# Altium PCB WUT-YJ-4-3-1.PcbDoc (part 2 of 11)
Units mm, origin at the board's own origin, x right, y up, seen from the top; angles counter-clockwise.
Board outline 85 x 56 mm, 4 copper layers (Top Layer, GND_Plane, 3V3_Plane, Bottom Layer); 182 components, 321 nets, 1106 pads, 360 vias.
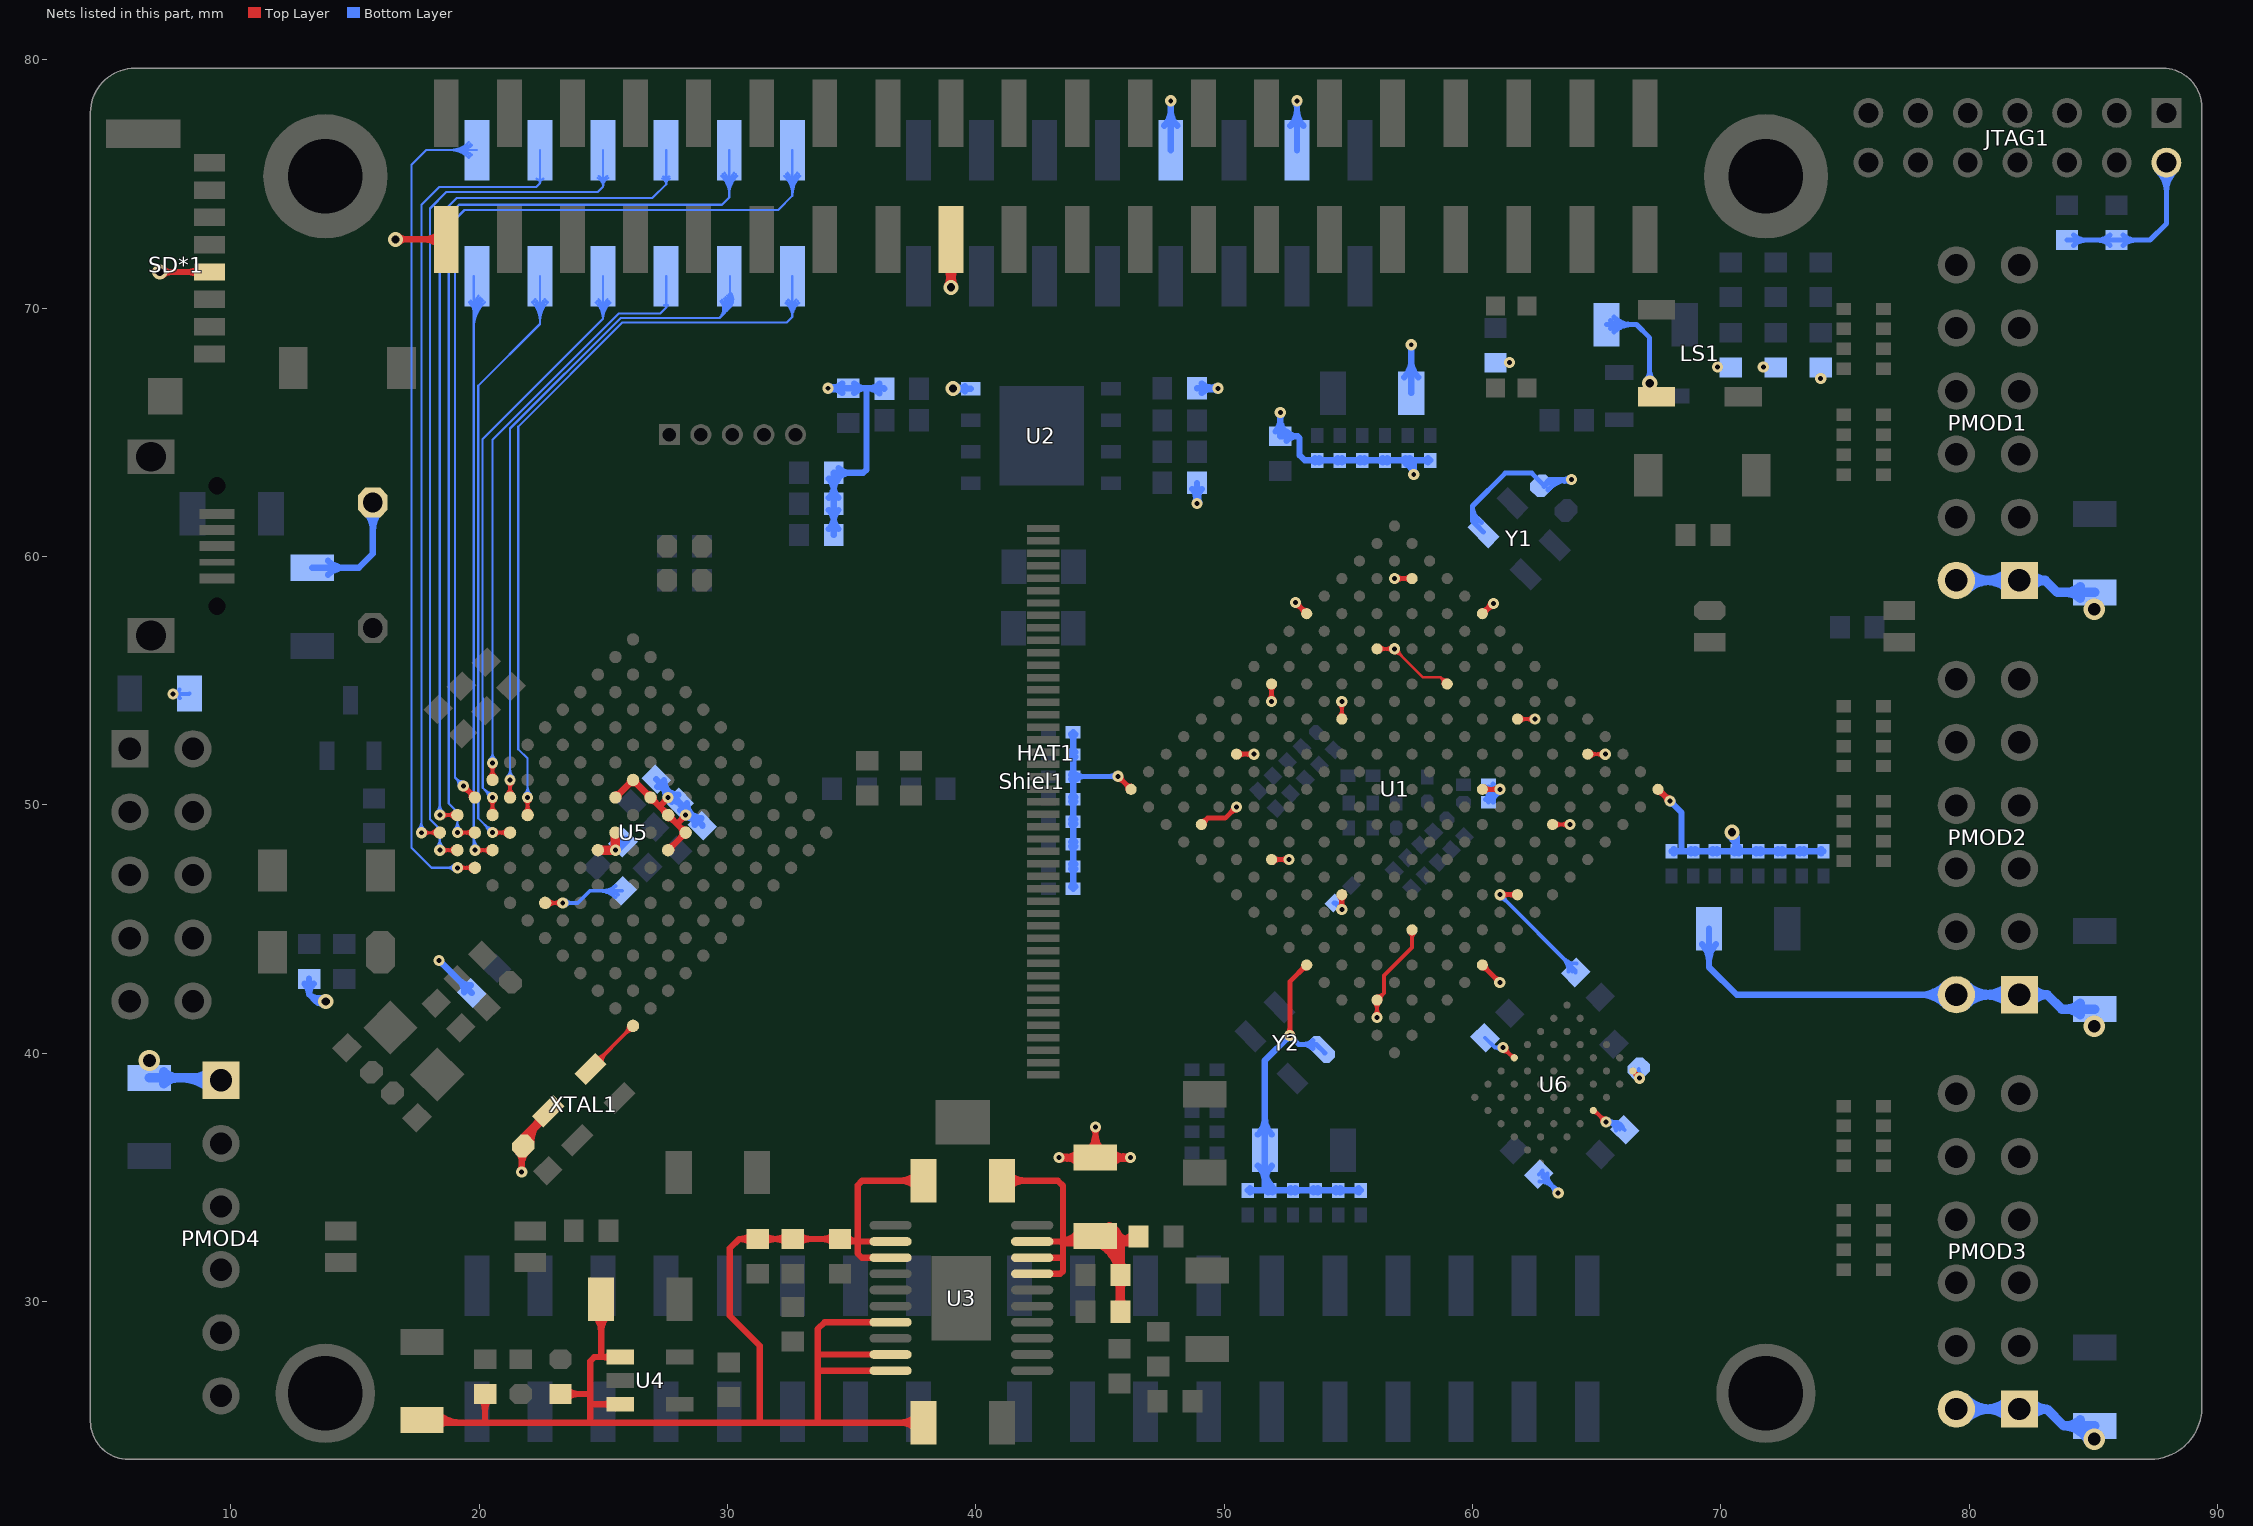
[diagram p4: the nets of this part, all layers, seen from the top]

## Via types
v1: diameter 0.45, hole 0.2, Top Layer to Bottom Layer, tented both sides, 280 vias
v2: diameter 0.61, hole 0.33, Top Layer to Bottom Layer, tented both sides, 40 vias
v3: diameter 0.403, hole 0.2, Top Layer to Bottom Layer, tented both sides, 15 vias
v4: diameter 0.5, hole 0.2, Top Layer to Bottom Layer, tented both sides, 12 vias
v5: diameter 0.864, hole 0.508, Top Layer to Bottom Layer, tented both sides, 11 vias
v6: diameter 0.864, hole 0.356, Top Layer to Bottom Layer, tented both sides, 1 vias
v7: diameter 0.864, hole 0.381, Top Layer to Bottom Layer, tented both sides, 1 vias

## Nets (pads, with @x,y where several pads share a name; then routed paths per layer and width w, separated by ;. In a path a pad name is that pad's centre, name@x,y a point inside that pad or via, vN(x,y) a via of type N, cw(c..) or ccw(c..) an arc to the next point about the centre after c; other vN are vias at no path point) (continued)
3V3: C1.1 C2.2 C3.1 C24.1 C25.1 C26.1 C27.1 C28.2 C29.1 C30.1 C31.1 C32.1 C33.1 C34.1 C35.2 C36.1 C37.1 C38.1 C39.1 C40.1 C41.1 C42.1 C43.1 C44.1 C45.1 C46.1 C47.1 C48.1 C49.1 C50.1 C51.1 C52.1 C53.1 C54.1 C55.1 C56.1 C62.2 C63.1 C66.2 C67.2 C68.2 C70.2 C71.2 C72.1 C73.1 D1.2 D6.1 D11.2 F3.1 FB4.1 HAT1.1 HAT1.17 JTAG1.2 LS1.1 LS2.1 PMOD1.1 PMOD1.2 PMOD2.1 PMOD2.2 PMOD3.1 PMOD3.2 PMOD4.1 R1.2 R3.1 R4.2 R6.2 R8.2 R10.2 R11.2 R13.2 R14.2 R15.1 R18.1 R19.1 R21.1 R27.2 R40.1 R42.1 R43.2 R44.2 R45.2 SD*1.4 Shiel1.22 Shiel1.26 U1.A6 U1.A16 U1.B3 U1.B13 U1.C10 U1.D7 U1.E4 U1.E14 U1.F1 U1.H15 U1.J2 U1.J12 U1.L6 U1.L16 U1.M3 U1.M13 U1.N10 U1.P7 U1.R4 U1.R14 U1.T1 U1.T11 U2.8 U5.E5 U5.E6 U5.E7 U5.E8 U5.F5 U5.F8 U5.L6 U6.A6 U6.D6 U6.E1 XTAL1.4 Y1.4 Y2.4 | length 358.5
  Top Layer w0.102: v1@56.858,56.113 cw(c56.858,55.692) 57.156,55.99 cw(c57.453,56.287) v1@57.033,56.287 ; v1(56.858,56.287) 57.993,55.153 58.7,55.153 ; U1.N10@58.806,54.881 ccw(c58.445,54.897) 58.7,55.152 ; U1.N10@58.972,55.047 cw(c58.956,55.408) 58.7,55.152 ; U1.N10@58.98,54.873 58.7,55.153
  Top Layer w0.152: U5.L6@22.664,46.058 v1(23.371,46.058) ; U5.L6@22.787,45.935 cw(c23.083,45.639) 23.083,46.058 cw(c23.083,46.478) U5.L6@22.787,46.181 ; v1@23.266,45.953 ccw(c23.012,45.699) 23.012,46.058 ccw(c23.012,46.418) v1@23.266,46.164 ; U1.J12@54.632,53.564 ccw(c54.378,53.818) 54.737,53.818 ccw(c55.096,53.818) U1.J12@54.842,53.564 ; v1@54.632,54.061 cw(c54.378,53.807) 54.737,53.807 cw(c55.096,53.807) v1@54.842,54.061 ; U1.J12@54.737,53.459 v1(54.737,54.166) ; v1@56.046,41.543 ccw(c55.792,41.797) 56.151,41.797 ccw(c56.51,41.797) v1@56.256,41.543 ; U1.B3@56.046,42.04 cw(c55.792,41.786) 56.151,41.786 cw(c56.51,41.786) U1.B3@56.256,42.04 ; v1(56.151,41.438) U1.B3@56.151,42.145 56.43,42.424 56.43,43.131 57.565,44.266 U1.E4@57.565,44.974 ; U1.B3@56.151,42.294 ccw(c56.151,42.653) 56.405,42.399 ccw(c56.659,42.145) U1.B3@56.3,42.145 ; U1.M13@56.151,56.287 v1(56.858,56.287) ; U1.M13@56.256,56.182 cw(c56.51,55.928) 56.51,56.287 cw(c56.51,56.646) U1.M13@56.256,56.392 ; v1@56.753,56.182 ccw(c56.499,55.928) 56.499,56.287 ccw(c56.499,56.646) v1@56.753,56.392 ; U1.E4@57.46,44.868 cw(c57.206,44.614) 57.565,44.614 cw(c57.925,44.614) U1.E4@57.671,44.868 ; v1@61.227,40.085 cw(c61.227,39.726) 61.481,39.98 cw(c61.735,40.234) v1@61.375,40.234 ; v1(61.227,40.234) 61.639,39.821 U6.E1@61.68,39.821 ; 61.493,39.968 ccw(c61.68,40.155) U6.E1@61.68,39.89 ; U1.P7@61.808,53.459 v1(62.515,53.459) ; U1.P7@61.913,53.354 cw(c62.167,53.1) 62.167,53.459 cw(c62.167,53.818) U1.P7@61.913,53.564 ; v1@62.41,53.354 ccw(c62.156,53.1) 62.156,53.459 ccw(c62.156,53.818) v1@62.41,53.564 ; U1.M3@63.222,49.216 v1(63.929,49.216) ; U1.M3@63.327,49.111 cw(c63.582,48.857) 63.582,49.216 cw(c63.582,49.575) U1.M3@63.327,49.321 ; v1@63.824,49.111 ccw(c63.57,48.857) 63.57,49.216 ccw(c63.57,49.575) v1@63.824,49.321 ; U1.R4@64.636,52.045 v1(65.344,52.045) ; U1.R4@64.742,51.939 cw(c64.996,51.685) 64.996,52.045 cw(c64.996,52.404) U1.R4@64.742,52.15 ; U6.D6@64.862,37.631 cw(c64.862,37.365) 65.05,37.553 ; U6.D6@64.862,37.7 64.904,37.7 v1(65.367,37.236) ; v1@65.218,37.236 ccw(c64.859,37.236) 65.113,37.49 ccw(c65.367,37.744) v1@65.367,37.385 ; v1@65.238,51.939 ccw(c64.984,51.685) 64.984,52.045 ccw(c64.984,52.404) v1@65.238,52.15 ; U6.A6@66.453,39.291 66.453,39.274 v1(66.726,39.002) ; U6.A6@66.514,39.264 ccw(c66.71,39.377) v1@66.72,39.15 ; U6.A6@66.522,39.291 ccw(c66.728,39.291) v1@66.583,39.145 ; 66.564,39.177 cw(c66.408,39.087) v1@66.582,39.04 ; v1@66.577,39.002 ccw(c66.218,39.002) 66.472,39.256 ccw(c66.726,39.51) v1@66.726,39.15
  Top Layer w0.203: v1@45.72,51.032 cw(c45.72,50.719) 45.942,50.94 ; v1@45.727,51.156 U1.A16@46.252,50.63 ; v1@45.843,51.156 ccw(c46.126,51.156) 45.926,50.956 ; U1.A16@46.128,50.63 ccw(c45.83,50.63) 46.041,50.841 ccw(c46.252,51.052) U1.A16@46.252,50.754 ; U1.B13@49.08,49.216 49.334,49.47 50.041,49.47 v1(50.494,49.923) ; U1.B13@49.08,49.34 ccw(c49.08,49.637) 49.291,49.427 ccw(c49.501,49.216) U1.B13@49.204,49.216 ; v1@50.371,49.923 cw(c50.073,49.923) 50.284,49.713 cw(c50.494,49.502) v1@50.494,49.8 ; U1.E14@50.494,52.045 v1(51.201,52.045) ; U1.E14@50.582,51.957 cw(c50.792,51.747) 50.792,52.045 cw(c50.792,52.343) U1.E14@50.582,52.132 ; v1@51.114,51.957 ccw(c50.904,51.747) 50.904,52.045 ccw(c50.904,52.343) v1@51.114,52.132 ; v1@51.821,54.253 ccw(c51.611,54.464) 51.909,54.464 ccw(c52.206,54.464) v1@51.996,54.253 ; U1.H15@51.821,54.786 cw(c51.611,54.575) 51.909,54.575 cw(c52.206,54.575) U1.H15@51.996,54.786 ; U1.C10@51.909,47.802 v1(52.616,47.802) ; v1(51.909,54.166) U1.H15@51.909,54.873 ; U1.C10@51.996,47.715 cw(c52.206,47.504) 52.206,47.802 cw(c52.206,48.1) U1.C10@51.996,47.889 ; v1@52.528,47.715 ccw(c52.318,47.504) 52.318,47.802 ccw(c52.318,48.1) v1@52.528,47.889 ; v1@52.554,40.803 ccw(c52.344,41.014) 52.642,41.014 ccw(c52.939,41.014) v1@52.729,40.803 ; v1(52.642,40.716) 52.642,42.883 53.317,43.559 U1.A6@53.323,43.559 ; v1@52.87,58.03 cw(c52.87,57.732) 53.081,57.943 cw(c53.291,58.153) v1@52.993,58.153 ; v1(52.87,58.153) U1.L16@53.323,57.701 ; 53.103,43.345 cw(c53.323,43.125) U1.A6@53.323,43.436 ; 53.111,57.913 ccw(c53.323,58.125) U1.L16@53.323,57.825 ; 53.113,57.911 cw(c52.903,57.701) U1.L16@53.199,57.701 ; 53.116,43.358 ccw(c52.914,43.559) U1.A6@53.199,43.559 ; v1@54.65,45.883 ccw(c54.439,46.094) 54.737,46.094 ccw(c55.035,46.094) v1@54.824,45.883 ; U1.D7@54.65,46.3 cw(c54.439,46.09) 54.737,46.09 cw(c55.035,46.09) U1.D7@54.824,46.3 ; v1(54.737,45.796) U1.D7@54.737,46.388 ; v1(56.858,59.116) U1.R14@57.565,59.116 ; v1@56.946,59.028 cw(c57.156,58.818) 57.156,59.116 cw(c57.156,59.414) v1@56.946,59.203 ; U1.R14@57.478,59.028 ccw(c57.268,58.818) 57.268,59.116 ccw(c57.268,59.414) U1.R14@57.478,59.203 ; U1.F1@60.394,43.436 cw(c60.394,43.145) 60.6,43.351 ; U1.F1@60.394,43.559 60.394,43.556 v1(61.096,42.854) ; U1.L6@60.394,50.63 v1(61.101,50.63) ; U1.T11@60.394,57.701 60.432,57.701 v1(60.846,58.115) ; U1.T11@60.394,57.825 ccw(c60.394,58.215) 60.67,57.939 ; U1.L6@60.481,50.543 cw(c60.692,50.332) 60.692,50.63 cw(c60.692,50.928) U1.L6@60.481,50.718 ; U1.T11@60.485,57.833 ccw(c60.226,58.281) v1@60.727,58.147 ; U1.F1@60.517,43.559 ccw(c60.822,43.559) 60.607,43.344 ; U1.T11@60.517,57.701 cw(c60.723,57.701) 60.578,57.847 ; 60.637,57.92 ccw(c60.549,58.073) v1@60.724,58.098 ; v1@60.722,58.115 cw(c60.424,58.115) 60.635,57.905 cw(c60.846,57.694) v1@60.846,57.992 ; v1@60.973,42.854 ccw(c60.675,42.854) 60.885,43.065 ccw(c61.096,43.276) v1@61.096,42.978 ; v1@61.014,50.543 ccw(c60.803,50.332) 60.803,50.63 ccw(c60.803,50.928) v1@61.014,50.718 ; v1(61.101,46.388) U1.J2@61.808,46.388 ; v1@61.188,46.3 cw(c61.399,46.09) 61.399,46.388 cw(c61.399,46.686) v1@61.188,46.475 ; U1.J2@61.721,46.3 ccw(c61.51,46.09) 61.51,46.388 ccw(c61.51,46.686) U1.J2@61.721,46.475
  Top Layer w0.254: v2(7.147,71.457) SD*1.4@9.144,71.457 ; v2@7.273,71.331 cw(c7.576,71.028) 7.576,71.457 cw(c7.576,71.886) v2@7.273,71.583 ; SD*1.4@8.711,71.299 ccw(c8.331,70.919) 8.331,71.457 ccw(c8.331,71.995) SD*1.4@8.711,71.615 ; v2(16.637,72.771) HAT1.1@18.682,72.771 ; v2@16.763,72.645 cw(c17.066,72.342) 17.066,72.771 cw(c17.066,73.2) v2@16.763,72.897 ; HAT1.1@18.418,72.507 ccw(c17.781,71.871) 17.781,72.771 ccw(c17.781,73.671) HAT1.1@18.418,73.035 ; C62.2@21.552,36.042 cw(c21.155,35.645) 21.717,35.645 ; v1@21.648,35.299 ccw(c21.48,35.466) 21.717,35.466 ccw(c21.954,35.466) v1@21.786,35.299 ; v1(21.717,35.23) 21.717,36.207 C62.2@21.781,36.271 21.781,36.664 XTAL1.4@22.787,37.67 ; 21.717,35.508 cw(c22.473,35.508) C62.2@21.939,36.042 ; C62.2@21.835,36.306 cw(c22.831,36.306) 22.127,37.01 ; C62.2@22.089,36.306 cw(c23.698,36.306) XTAL1.4@22.56,37.444 ; 22.329,37.043 cw(c22.778,36.784) XTAL1.4@22.644,37.285 ; 22.357,37.092 ccw(c21.978,37.311) XTAL1.4@22.401,37.425 ; XTAL1.4@22.394,37.476 cw(c21.916,37.476) 22.254,37.138 cw(c22.593,36.8) XTAL1.4@22.593,37.278 ; U5.F5@25.492,50.301 U5.E5@26.199,51.008 U5.E7@27.613,49.594 U5.E8@28.321,48.887 U5.F8@27.613,48.18 ; U5.F5@25.492,50.424 ccw(c25.492,50.721) 25.702,50.511 ccw(c25.912,50.301) U5.F5@25.615,50.301 ; U5.E5@26.076,51.008 cw(c25.779,51.008) 25.989,50.798 cw(c26.199,50.588) 26.199,50.885 cw(c26.199,50.588) 26.409,50.798 cw(c26.619,51.008) U5.E5@26.322,51.008 ; U5.E6@26.783,50.301 ccw(c26.486,50.301) 26.696,50.511 ccw(c26.906,50.721) U5.E6@26.906,50.424 ; U5.E6@26.906,50.178 cw(c26.906,49.881) 27.116,50.091 cw(c27.326,50.301) U5.E6@27.029,50.301 ; 27.269,49.957 v1(27.613,50.301) ; U5.E7@27.49,49.594 ccw(c27.194,49.594) 27.403,49.804 ccw(c27.613,50.014) U5.E7@27.613,49.717 ; v1@27.515,50.301 cw(c27.279,50.301) 27.446,50.134 cw(c27.613,49.966) v1@27.613,50.203 ; U5.F8@27.613,48.303 ccw(c27.613,48.6) 27.823,48.39 ccw(c28.033,48.18) U5.F8@27.736,48.18 ; U5.E7@27.613,49.471 cw(c27.613,49.174) 27.823,49.384 cw(c28.033,49.594) U5.E7@27.736,49.594 ; 27.973,49.246 v1(28.321,49.594) ; v1@28.223,49.594 cw(c27.986,49.594) 28.153,49.427 cw(c28.321,49.259) v1@28.321,49.496 ; U5.E8@28.321,48.764 ccw(c28.321,48.467) 28.111,48.677 ccw(c27.901,48.887) 28.198,48.887 ccw(c27.901,48.887) 28.111,49.097 ccw(c28.321,49.307) U5.E8@28.321,49.01 ; HAT1.17@38.738,71.657 cw(c38.101,71.021) 39.002,71.021 cw(c39.902,71.021) HAT1.17@39.266,71.657 ; v2@38.848,70.93 ccw(c38.338,71.224) 38.907,71.376 ; v2@38.876,70.966 ccw(c38.573,71.27) 39.002,71.27 ccw(c39.431,71.27) v2@39.128,70.966 ; v2@38.913,70.995 ccw(c38.778,71.229) 39.039,71.159 ; 38.965,71.159 ccw(c39.226,71.229) v2@39.091,70.995 ; v2(39.002,70.841) HAT1.17@39.002,72.771 ; 39.097,71.376 ccw(c39.665,71.224) v2@39.156,70.93 ; v1(43.345,35.802) F3.1@44.818,35.802 ; v1@43.394,35.717 cw(c43.584,35.388) 43.683,35.755 ; v1@43.394,35.886 ccw(c43.584,36.215) 43.683,35.848 ; v1@43.415,35.732 cw(c43.582,35.565) 43.582,35.802 cw(c43.582,36.038) v1@43.415,35.871 ; F3.1@44.187,35.52 ccw(c43.507,34.841) 43.507,35.802 ccw(c43.507,36.762) F3.1@44.187,36.083 ; F3.1@44.537,36.083 ccw(c43.857,36.762) 44.818,36.762 ccw(c45.779,36.762) F3.1@45.1,36.083 ; v1@44.749,36.964 cw(c44.582,36.797) 44.818,36.797 cw(c45.055,36.797) v1@44.888,36.964 ; v1(44.818,37.033) F3.1@44.818,35.802 ; F3.1@45.45,35.52 cw(c46.129,34.841) 46.129,35.802 cw(c46.129,36.762) F3.1@45.45,36.083 ; 45.933,35.749 cw(c46.017,35.436) v1@46.179,35.717 ; 45.933,35.854 ccw(c46.017,36.167) v1@46.179,35.886 ; v1@46.159,35.732 ccw(c45.992,35.565) 45.992,35.802 ccw(c45.992,36.038) v1@46.159,35.871 ; v1(46.228,35.802) F3.1@44.818,35.802 ; U1.T1@67.465,50.532 cw(c67.465,50.26) 67.657,50.453 ; U1.T1@67.465,50.63 67.48,50.63 v1(67.945,50.165) ; v1@67.847,50.165 ccw(c67.61,50.165) 67.778,50.332 ccw(c67.945,50.5) v1@67.945,50.263
  Bottom Layer w0.152: v1@7.789,54.365 cw(c8.043,54.111) 8.043,54.47 cw(c8.043,54.83) v1@7.789,54.576 ; D6.1@7.946,54.646 cw(c7.684,54.754) v1(7.683,54.47) ; D6.1@7.955,54.299 ccw(c7.684,54.169) v1(7.683,54.47) ; D6.1@8.337,54.483 8.325,54.47 v1(7.683,54.47) ; v1(23.371,46.058) 23.976,46.058 24.464,46.546 FB4.1@25.755,46.546 ; v1@23.476,45.953 cw(c23.73,45.699) 23.73,46.058 cw(c23.73,46.418) v1@23.476,46.164 ; 24.853,46.546 cw(c24.853,45.643) FB4.1@25.491,46.282 ; 25.024,46.546 ccw(c25.024,47.207) FB4.1@25.491,46.739 ; FB4.1@25.221,46.546 cw(c25.221,46.011) FB4.1@25.599,46.389 ; C71.2@60.503,40.628 60.897,40.234 ; v1@61.101,46.239 cw(c61.101,45.88) 61.355,46.134 cw(c61.609,46.388) v1@61.25,46.388 ; v1(61.101,46.388) 64.148,43.341 R45.2@64.148,43.256 ; v1@61.115,40.135 ccw(c60.897,39.943) 60.897,40.234 ; v1@61.115,40.332 cw(c60.897,40.524) 60.897,40.234 ; v1(61.227,40.234) 60.897,40.234 ; R44.2@62.661,35.129 62.814,35.281 62.814,35.015 v1(63.449,34.379) ; R44.2@62.697,34.84 cw(c62.697,34.137) 63.194,34.634 ; R44.2@62.868,35.164 ccw(c63.361,35.164) 63.012,34.816 ; R44.2@63.021,35.164 ccw(c63.881,35.164) 63.273,34.555 ; 63.136,34.793 ccw(c63.638,35.083) v1@63.488,34.523 ; v1@63.3,34.379 ccw(c62.941,34.379) 63.195,34.633 ccw(c63.449,34.887) v1@63.449,34.528 ; 63.621,43.868 cw(c63.044,43.291) R45.2@63.86,43.291 ; 63.655,43.834 ccw(c64.183,44.363) R45.2@64.183,43.615 ; 63.881,43.608 cw(c63.564,43.291) R45.2@64.012,43.291 ; v1@65.472,37.131 cw(c65.726,36.877) 65.726,37.236 cw(c65.726,37.596) v1@65.472,37.342 ; v1@65.485,37.146 cw(c65.618,37.046) 65.661,37.207 ; v1@65.496,37.311 ccw(c65.667,37.41) 65.616,37.219 ; v1@65.549,37.236 cw(c65.549,36.855) C70.2@65.925,36.923 ; 65.732,37.236 cw(c65.732,36.888) C70.2@66.075,36.951 ; C70.2@65.775,36.896 ccw(c65.367,36.822) v1(65.367,37.236) 65.811,37.236 C70.2@66.129,36.919 ; R43.2@66.621,39.107 ccw(c66.459,39.268) R43.2@66.687,39.268 ; v1(66.726,39.002) 66.687,39.04 R43.2@66.687,39.383 ccw(c67.02,39.383) R43.2@66.817,39.119
  Bottom Layer w0.203: C37.1@43.921,51.143 43.934,51.156 v1(45.72,51.156) ; C37.1@44.076,51.025 cw(c44.391,50.711) 44.391,51.156 ; C37.1@44.076,51.235 ccw(c44.268,51.427) 44.268,51.156 ; v1@45.633,51.068 ccw(c45.422,50.858) 45.422,51.156 ccw(c45.422,51.454) v1@45.633,51.243 ; v1@52.642,40.593 cw(c52.642,40.295) 52.852,40.506 cw(c53.063,40.716) v1@52.765,40.716 ; v1(52.642,40.716) 52.997,40.361 53.707,40.361 Y2.4@54.048,40.019 ; 53.17,40.361 cw(c53.17,39.796) Y2.4@53.569,40.195 ; 53.206,40.361 ccw(c53.206,40.875) Y2.4@53.569,40.511 ; R3.1@54.422,46.052 54.481,46.052 v1(54.737,45.796) ; v1@54.614,45.796 ccw(c54.316,45.796) 54.526,46.007 ccw(c54.737,46.218) v1@54.737,45.92 ; 59.995,61.672 ccw(c60.558,61.672) Y1.4@60.259,61.195 ; Y1.4@60.367,61.367 cw(c60.789,62.039) 59.995,62.039 ; Y1.4@60.442,60.984 59.995,61.431 59.995,62.039 ; C28.2@60.53,50.219 ccw(c60.276,50.472) 60.635,50.472 ccw(c60.993,50.472) C28.2@60.739,50.219 ; C35.2@60.53,50.708 cw(c60.276,50.454) 60.635,50.454 cw(c60.993,50.454) C35.2@60.739,50.708 ; C28.2@60.635,50.114 60.635,50.444 ; C35.2@60.635,50.724 C35.2@60.635,50.635 ; C35.2@60.792,50.635 cw(c60.792,50.322) v1@61.014,50.543 ; C28.2@60.812,50.267 cw(c61.265,50.006) v1@61.132,50.511 ; C35.2@60.814,50.635 ccw(c60.814,50.917) v1@61.014,50.718 ; C28.2@60.829,50.147 cw(c61.141,50.218) 60.915,50.444 ; C35.2@60.829,50.847 ccw(c61.096,50.91) v1@61.096,50.635 ; C28.2@60.833,50.114 cw(c61.432,50.114) v1@61.008,50.538 ; C28.2@60.882,50.318 cw(c61.24,50.112) v1@61.133,50.511 ; 60.941,50.444 ccw(c60.941,50.698) v1@61.174,50.599 ; v1@60.987,50.678 cw(c60.635,50.827) 60.635,50.444 ; C2.2@62.882,62.823 cw(c63.523,62.24) 63.523,63.106 ; C2.2@63.032,62.686 cw(c63.983,61.821) v1(63.983,63.106) 63.094,63.106 62.865,62.877 62.382,63.36 61.316,63.36 59.995,62.039 ; v1@63.876,63.168 cw(c63.618,63.317) 63.695,63.029 cw(c63.772,62.741) v1@63.921,62.999 ; v1@63.895,63.019 ccw(c63.685,62.808) 63.685,63.106 ccw(c63.685,63.404) v1@63.895,63.194 ; D1.2@65.392,69.342 66.599,69.342 67.132,68.809 v2(67.132,66.98) ; D1.2@65.548,69.186 cw(c65.924,68.81) 65.924,69.342 cw(c65.924,69.874) D1.2@65.548,69.498 ; D1.2@65.691,69.043 cw(c66.414,68.32) 66.414,69.342 cw(c66.414,70.364) D1.2@65.691,69.641 ; v2@66.989,67.123 ccw(c66.642,67.47) 67.132,67.47 ccw(c67.623,67.47) v2@67.276,67.123 ; R14.2@83.934,72.744 R13.2@85.928,72.744 87.273,72.744 87.935,73.406 JTAG1.2@87.935,75.864 ; R14.2@84.195,72.533 cw(c84.705,72.024) 84.705,72.744 cw(c84.705,73.464) R14.2@84.195,72.955 ; R13.2@85.667,72.533 ccw(c85.158,72.024) 85.158,72.744 ccw(c85.158,73.464) R13.2@85.667,72.955 ; R13.2@86.189,72.533 cw(c86.699,72.024) 86.699,72.744 cw(c86.699,73.464) R13.2@86.189,72.955 ; JTAG1.2@87.582,75.511 cw(c86.732,74.66) 87.935,74.66 cw(c89.138,74.66) JTAG1.2@88.287,75.511 ; JTAG1.2@87.726,75.655 cw(c87.222,75.151) 87.935,75.151 cw(c88.647,75.151) JTAG1.2@88.144,75.655 ; 60.635,50.444 cw(c60.341,50.444) 60.536,50.225 ccw(c60.341,50.444) 60.635,50.444 ; 60.635,50.444 ccw(c60.928,50.444) 60.733,50.225 cw(c60.928,50.444) 60.635,50.444 ; 60.635,50.444 C35.2@60.635,50.635 ; 60.635,50.444 60.915,50.444 ; C35.2@60.635,50.635 v1@61.096,50.635 ; 60.915,50.444 v1(61.101,50.63) v1@61.096,50.635
  Bottom Layer w0.254: R42.1@12.973,42.799 cw(c12.588,42.38) 13.157,42.38 ; R42.1@13.157,43.001 13.157,42.38 ; D11.2@13.284,59.551 15.164,59.551 15.723,60.109 LS2.1@15.723,62.179 ; R42.1@13.342,42.799 ccw(c13.726,42.38) 13.157,42.38 ; 13.431,42.106 ccw(c13.713,42.387) v2@13.858,42.017 ; v2@13.694,41.974 ccw(c13.449,41.769) 13.449,42.088 ; v2@13.694,42.202 cw(c13.449,42.407) 13.449,42.088 ; v2@13.765,42.253 cw(c13.558,42.78) 13.157,42.38 ; v2(13.83,42.088) 13.449,42.088 ; D11.2@13.916,59.269 cw(c14.595,58.59) 14.595,59.551 cw(c14.595,60.511) D11.2@13.916,59.832 ; LS2.1@15.388,61.845 cw(c14.581,61.037) 15.723,61.037 cw(c16.865,61.037) LS2.1@16.057,61.845 ; v1@18.39,43.641 cw(c18.39,43.372) 18.58,43.562 ; v1(18.39,43.739) 18.403,43.739 R40.1@19.711,42.431 ; R40.1@19.402,42.466 ccw(c18.743,42.466) 19.209,42.932 ccw(c19.675,43.398) R40.1@19.675,42.739 ; C66.2@27.14,51.041 28.994,49.187 C67.2@28.994,49.161 ; C66.2@27.175,50.733 cw(c27.175,50.074) 27.641,50.54 cw(c28.107,51.006) C66.2@27.448,51.006 ; C66.2@27.258,50.922 cw(c26.637,50.301) v1@27.515,50.301 ; 27.556,50.624 cw(c27.069,50.137) C68.2@27.758,50.137 ; 27.587,50.594 ccw(c28.031,51.038) C68.2@28.031,50.41 ; C68.2@27.613,50.203 cw(c27.613,49.324) C68.2@28.235,49.946 ; C68.2@27.965,50.215 cw(c27.344,49.594) v1@28.223,49.594 ; C68.2@28.102,49.793 cw(c28.102,49.103) 28.59,49.591 ; v1@28.321,49.496 cw(c28.321,48.617) C67.2@28.942,49.239 ; v1@28.327,49.496 cw(c28.354,49.08) C67.2@28.716,49.289 ; C68.2@28.375,50.066 ccw(c29.003,50.066) 28.559,49.621 ; v1@28.378,49.515 cw(c28.568,49.257) 28.728,49.534 ; v1@28.474,49.706 cw(c27.965,49.197) C67.2@28.685,49.197 ; v1@28.536,49.645 ccw(c28.958,50.067) C67.2@28.958,49.47 ; v1(34.05,66.778) C1.1@34.861,66.778 35.598,66.778 ; R8.2@34.086,61.114 ccw(c33.62,61.58) 34.279,61.58 ccw(c34.938,61.58) R8.2@34.472,61.114 ; R11.2@34.086,61.879 cw(c33.62,61.413) 34.279,61.413 cw(c34.938,61.413) R11.2@34.472,61.879 ; R11.2@34.086,62.365 ccw(c33.62,62.831) 34.279,62.831 ccw(c34.938,62.831) R11.2@34.472,62.365 ; R10.2@34.086,63.13 cw(c33.62,62.664) 34.279,62.664 cw(c34.938,62.664) R10.2@34.472,63.13 ; v1@34.099,66.693 cw(c34.263,66.41) 34.347,66.726 ; v1@34.099,66.863 ccw(c34.263,67.146) 34.347,66.83 ; v1@34.119,66.709 cw(c34.287,66.542) 34.287,66.778 cw(c34.287,67.015) v1@34.119,66.847 ; R8.2@34.279,60.871 R11.2@34.279,62.122 R10.2@34.279,63.373 35.471,63.373 35.598,63.5 35.598,66.778 ; R10.2@34.472,63.18 cw(c34.938,62.714) 34.938,63.373 cw(c34.938,64.032) R10.2@34.472,63.566 ; C1.1@34.618,66.585 ccw(c34.152,66.119) 34.152,66.778 ccw(c34.152,67.437) C1.1@34.618,66.971 ; C1.1@35.105,66.585 cw(c35.571,66.119) 35.571,66.778 cw(c35.571,67.437) C1.1@35.105,66.971 ; 35.626,66.778 cw(c35.626,66.071) R21.1@36.126,66.571 ; 35.694,66.778 ccw(c35.694,67.389) R21.1@36.126,66.957 ; R21.1@36.319,66.764 36.305,66.778 35.598,66.778 ; v2(39.078,66.764) U2.8@39.797,66.764 ; v2@39.204,66.638 cw(c39.507,66.335) 39.507,66.764 cw(c39.507,67.193) v2@39.204,66.89 ; v2@39.233,66.677 cw(c39.355,66.609) 39.391,66.743 ; v2@39.233,66.851 ccw(c39.355,66.919) 39.391,66.784 ; U2.8@39.567,66.659 ccw(c39.314,66.407) 39.314,66.764 ccw(c39.314,67.121) U2.8@39.567,66.869 ; C55.1@43.834,46.709 ccw(c43.624,46.919) 43.921,46.919 ccw(c44.218,46.919) C55.1@44.008,46.709 ; C53.1@43.834,47.436 cw(c43.624,47.226) 43.921,47.226 cw(c44.218,47.226) C53.1@44.008,47.436 ; C53.1@43.834,47.61 ccw(c43.624,47.82) 43.921,47.82 ccw(c44.218,47.82) C53.1@44.008,47.61 ; C49.1@43.834,48.338 cw(c43.624,48.128) 43.921,48.128 cw(c44.218,48.128) C49.1@44.008,48.338 ; C49.1@43.834,48.512 ccw(c43.624,48.722) 43.921,48.722 ccw(c44.218,48.722) C49.1@44.008,48.512 ; C45.1@43.834,49.24 cw(c43.624,49.03) 43.921,49.03 cw(c44.218,49.03) C45.1@44.008,49.24 ; C45.1@43.834,49.414 ccw(c43.624,49.624) 43.921,49.624 ccw(c44.218,49.624) C45.1@44.008,49.414 ; C41.1@43.834,50.142 cw(c43.624,49.932) 43.921,49.932 cw(c44.218,49.932) C41.1@44.008,50.142 ; C41.1@43.834,50.315 ccw(c43.624,50.525) 43.921,50.525 ccw(c44.218,50.525) C41.1@44.008,50.315 ; C37.1@43.834,51.043 cw(c43.624,50.833) 43.921,50.833 cw(c44.218,50.833) C37.1@44.008,51.043 ; C37.1@43.834,51.217 ccw(c43.624,51.427) 43.921,51.427 ccw(c44.218,51.427) C37.1@44.008,51.217 ; C32.1@43.834,51.945 cw(c43.624,51.735) 43.921,51.735 cw(c44.218,51.735) C32.1@44.008,51.945 ; C32.1@43.834,52.119 ccw(c43.624,52.329) 43.921,52.329 ccw(c44.218,52.329) C32.1@44.008,52.119 ; C27.1@43.834,52.847 cw(c43.624,52.637) 43.921,52.637 cw(c44.218,52.637) C27.1@44.008,52.847 ; C55.1@43.921,46.622 C53.1@43.921,47.523 C49.1@43.921,48.425 C45.1@43.921,49.327 43.921,51.143 C32.1@43.921,52.032 C27.1@43.921,52.934 ; Shiel1.22@47.585,77.344 ccw(c46.948,77.981) 47.849,77.981 ccw(c48.749,77.981) Shiel1.22@48.112,77.344 ; v1@47.779,78.282 cw(c47.612,78.115) 47.849,78.115 cw(c48.085,78.115) v1@47.918,78.282 ; Shiel1.22@47.849,76.365 v1(47.849,78.351) ; R18.1@48.716,62.724 cw(c48.25,62.258) 48.909,62.258 cw(c49.568,62.258) R18.1@49.102,62.724 ; v1@48.824,62.189 ccw(c48.529,62.359) 48.858,62.447 ; v1@48.84,62.209 ccw(c48.673,62.376) 48.909,62.376 ccw(c49.146,62.376) v1@48.978,62.209 ; v1(48.909,62.14) R18.1@48.909,62.967 ; R15.1@48.909,66.777 v1(49.746,66.777) ; 48.96,62.447 ccw(c49.289,62.359) v1@48.994,62.189 ; R15.1@49.102,66.584 cw(c49.568,66.118) 49.568,66.777 cw(c49.568,67.436) R15.1@49.102,66.97 ; 49.398,66.731 cw(c49.5,66.351) v1@49.697,66.692 ; 49.398,66.822 ccw(c49.5,67.202) v1@49.697,66.861 ; v1@49.677,66.707 ccw(c49.509,66.54) 49.509,66.777 ccw(c49.509,67.013) v1@49.677,66.846 ; C25.1@50.952,34.485 C30.1@51.862,34.485 ; C25.1@51.039,34.398 cw(c51.249,34.188) 51.249,34.485 cw(c51.249,34.782) C25.1@51.039,34.572 ; C51.1@51.357,35.475 cw(c50.677,34.795) 51.638,34.795 cw(c52.599,34.795) C51.1@51.919,35.475 ; C51.1@51.357,36.738 ccw(c50.677,37.417) 51.638,37.417 ccw(c52.599,37.417) C51.1@51.919,36.738 ; C30.1@51.638,34.759 ccw(c52.086,34.759) C30.1@51.769,34.443 ; C51.1@51.638,35.372 ccw(c52.699,35.372) C30.1@51.949,34.622 ; C30.1@51.775,34.398 ccw(c51.565,34.188) 51.565,34.485 ccw(c51.565,34.782) C30.1@51.775,34.572 ; C30.1@51.949,34.398 cw(c52.159,34.188) 52.159,34.485 cw(c52.159,34.782) C30.1@51.949,34.572 ; R19.1@52.067,65.041 ccw(c51.601,65.507) 52.26,65.507 ccw(c52.92,65.507) R19.1@52.454,65.041 ; v1@52.191,65.729 cw(c52.024,65.562) 52.26,65.562 cw(c52.497,65.562) v1@52.33,65.729 ; v1(52.26,65.799) R19.1@52.26,64.848 52.958,64.848 ; R19.1@52.506,64.657 cw(c52.957,64.218) 52.957,64.848 ; R19.1@52.506,65.038 ccw(c52.957,65.478) 52.957,64.848 ; v1@52.544,40.716 cw(c52.307,40.716) 52.474,40.549 cw(c52.642,40.382) v1@52.642,40.618 ; v1(52.642,40.716) 51.638,39.713 51.638,34.485 C30.1@51.862,34.485 ; Shiel1.26@52.665,77.344 ccw(c52.028,77.981) 52.929,77.981 ccw(c53.829,77.981) Shiel1.26@53.192,77.344 ; C34.1@52.684,34.398 ccw(c52.474,34.188) 52.474,34.485 ccw(c52.474,34.782) C34.1@52.684,34.572 ; C34.1@52.858,34.398 cw(c53.068,34.188) 53.068,34.485 cw(c53.068,34.782) C34.1@52.858,34.572 ; v1@52.859,78.282 cw(c52.692,78.115) 52.929,78.115 cw(c53.165,78.115) v1@52.998,78.282 ; Shiel1.26@52.929,76.365 v1(52.929,78.351) ; C39.1@53.593,34.398 ccw(c53.383,34.188) 53.383,34.485 ccw(c53.383,34.782) C39.1@53.593,34.572 ; C46.1@53.659,63.789 ccw(c53.449,63.579) 53.449,63.876 ccw(c53.449,64.173) C46.1@53.659,63.963 ; C39.1@53.767,34.398 cw(c53.977,34.188) 53.977,34.485 cw(c53.977,34.782) C39.1@53.767,34.572 ; C46.1@53.833,63.789 cw(c54.043,63.579) 54.043,63.876 cw(c54.043,64.173) C46.1@53.833,63.963 ; C43.1@54.503,34.398 ccw(c54.293,34.188) 54.293,34.485 ccw(c54.293,34.782) C43.1@54.503,34.572 ; C42.1@54.569,63.789 ccw(c54.359,63.579) 54.359,63.876 ccw(c54.359,64.173) C42.1@54.569,63.963 ; C43.1@54.677,34.398 cw(c54.887,34.188) 54.887,34.485 cw(c54.887,34.782) C43.1@54.677,34.572 ; C42.1@54.743,63.789 cw(c54.953,63.579) 54.953,63.876 cw(c54.953,64.173) C42.1@54.743,63.963 ; C47.1@55.412,34.398 ccw(c55.202,34.188) 55.202,34.485 ccw(c55.202,34.782) C47.1@55.412,34.572 ; C38.1@55.478,63.789 ccw(c55.268,63.579) 55.268,63.876 ccw(c55.268,64.173) C38.1@55.478,63.963 ; C47.1@55.499,34.485 C30.1@51.862,34.485 ; C38.1@55.652,63.789 cw(c55.862,63.579) 55.862,63.876 cw(c55.862,64.173) C38.1@55.652,63.963 ; C33.1@56.387,63.789 ccw(c56.177,63.579) 56.177,63.876 ccw(c56.177,64.173) C33.1@56.387,63.963 ; C33.1@56.561,63.789 cw(c56.771,63.579) 56.771,63.876 cw(c56.771,64.173) C33.1@56.561,63.963 ; C50.1@57.25,67.218 ccw(c56.57,67.897) 57.531,67.897 ccw(c58.492,67.897) C50.1@57.813,67.218 ; C29.1@57.297,63.789 ccw(c57.087,63.579) 57.087,63.876 ccw(c57.087,64.173) C29.1@57.297,63.963 ; C29.1@57.333,63.714 cw(c57.127,63.253) v1@57.633,63.253 ; C29.1@57.437,63.946 cw(c57.302,63.644) C29.1@57.633,63.644 ; v1@57.462,68.46 cw(c57.295,68.292) 57.531,68.292 cw(c57.768,68.292) v1@57.6,68.46 ; C29.1@57.471,63.789 cw(c57.681,63.579) 57.681,63.876 cw(c57.681,64.173) C29.1@57.471,63.963 ; C50.1@57.531,66.586 v1(57.531,68.529) ; v1@57.563,63.379 ccw(c57.396,63.546) 57.633,63.546 ccw(c57.869,63.546) v1@57.702,63.379 ; v1(57.633,63.309) C29.1@57.633,63.876 ; C24.1@58.206,63.789 ccw(c57.996,63.579) 57.996,63.876 ccw(c57.996,64.173) C24.1@58.206,63.963 ; C24.1@58.293,63.876 C29.1@57.633,63.876 ; v1@67.945,50.067 cw(c67.945,49.83) 68.112,49.998 cw(c68.28,50.165) v1@68.043,50.165 ; v1(67.945,50.165) 68.415,49.695 68.415,48.138 ; C26.1@68.008,48.138 68.415,48.138 ; C26.1@68.095,48.051 cw(c68.305,47.841) 68.305,48.138 cw(c68.305,48.435) C26.1@68.095,48.225 ; C31.1@68.796,48.051 ccw(c68.586,47.841) 68.586,48.138 ccw(c68.586,48.435) C31.1@68.796,48.225 ; C31.1@68.97,48.051 cw(c69.18,47.841) 69.18,48.138 cw(c69.18,48.435) C31.1@68.97,48.225 ; C56.1@69.238,44.39 cw(c68.559,43.711) 69.52,43.711 cw(c70.48,43.711) C56.1@69.801,44.39 ; C56.1@69.52,45.021 69.52,43.472 70.631,42.361 PMOD2.2@79.477,42.361 ; C36.1@69.67,48.051 ccw(c69.461,47.841) 69.461,48.138 ccw(c69.461,48.435) C36.1@69.67,48.225 ; C36.1@69.844,48.051 cw(c70.054,47.841) 70.054,48.138 cw(c70.054,48.435) C36.1@69.844,48.225 ; v2@70.328,48.764 cw(c69.787,48.114) C40.1@70.632,48.114 ; v2(70.441,48.9) 70.632,48.71 C40.1@70.632,48.138 ; v2@70.49,48.959 cw(c70.238,48.656) 70.632,48.656 ; C40.1@70.545,48.051 ccw(c70.335,47.841) 70.335,48.138 ccw(c70.335,48.435) C40.1@70.545,48.225 ; C40.1@70.545,48.275 ccw(c70.335,48.485) 70.632,48.485 ccw(c70.929,48.485) C40.1@70.719,48.275 ; C40.1@70.719,48.051 cw(c70.929,47.841) 70.929,48.138 cw(c70.929,48.435) C40.1@70.719,48.225 ; C44.1@71.419,48.051 ccw(c71.209,47.841) 71.209,48.138 ccw(c71.209,48.435) C44.1@71.419,48.225 ; C44.1@71.593,48.051 cw(c71.803,47.841) 71.803,48.138 cw(c71.803,48.435) C44.1@71.593,48.225 ; C48.1@72.294,48.051 ccw(c72.084,47.841) 72.084,48.138 ccw(c72.084,48.435) C48.1@72.294,48.225 ; C48.1@72.468,48.051 cw(c72.678,47.841) 72.678,48.138 cw(c72.678,48.435) C48.1@72.468,48.225 ; C52.1@73.168,48.051 ccw(c72.958,47.841) 72.958,48.138 ccw(c72.958,48.435) C52.1@73.168,48.225 ; C52.1@73.342,48.051 cw(c73.552,47.841) 73.552,48.138 cw(c73.552,48.435) C52.1@73.342,48.225 ; C54.1@74.043,48.051 ccw(c73.833,47.841) 73.833,48.138 ccw(c73.833,48.435) C54.1@74.043,48.225 ; C54.1@74.13,48.138 C52.1@73.255,48.138 C48.1@72.381,48.138 C44.1@71.506,48.138 C40.1@70.632,48.138 ; PMOD2.2@79.036,41.92 ccw(c77.973,40.857) 77.973,42.361 ccw(c77.973,43.865) PMOD2.2@79.036,42.801 ; PMOD2.2@79.216,42.1 ccw(c78.586,41.47) 78.586,42.361 ccw(c78.586,43.252) PMOD2.2@79.216,42.622 ; 13.157,42.38 13.449,42.088 ; 52.958,64.848 53.035,64.77 53.035,64.084 53.243,63.876 C46.1@53.746,63.876 C42.1@54.656,63.876 C38.1@55.565,63.876 C33.1@56.474,63.876 C29.1@57.384,63.876 C29.1@57.633,63.876 ; 68.415,48.138 C31.1@68.883,48.138 C36.1@69.757,48.138 C40.1@70.632,48.138
  Bottom Layer w0.381: C3.1@6.718,39.015 9.512,39.015 PMOD4.1@9.614,38.913 ; C3.1@7.305,38.778 cw(c7.876,38.207) 7.876,39.015 cw(c7.876,39.822) C3.1@7.305,39.251 ; 8.017,39.015 cw(c8.017,37.316) PMOD4.1@9.218,38.517 ; 8.509,39.015 ccw(c8.509,40.018) PMOD4.1@9.218,39.308 ; PMOD3.2@79.477,25.679 PMOD3.1@82.017,25.679 83.121,25.679 ; PMOD2.2@79.477,42.361 PMOD2.1@82.017,42.361 83.141,42.361 ; PMOD1.2@79.477,59.042 PMOD1.1@82.017,59.042 83.058,59.042 ; PMOD3.2@79.872,25.284 cw(c80.827,24.329) 80.827,25.679 cw(c80.827,27.03) PMOD3.2@79.872,26.075 ; PMOD2.2@79.872,41.965 cw(c80.827,41.01) 80.827,42.361 cw(c80.827,43.712) PMOD2.2@79.872,42.756 ; PMOD1.2@79.872,58.647 cw(c80.827,57.692) 80.827,59.042 cw(c80.827,60.393) PMOD1.2@79.872,59.438 ; PMOD3.1@81.621,25.284 ccw(c80.666,24.329) 80.666,25.679 ccw(c80.666,27.03) PMOD3.1@81.621,26.075 ; PMOD2.1@81.621,41.965 ccw(c80.666,41.01) 80.666,42.361 ccw(c80.666,43.712) PMOD2.1@81.621,42.756 ; PMOD1.1@81.621,58.647 ccw(c80.666,57.692) 80.666,59.042 ccw(c80.666,60.393) PMOD1.1@81.621,59.438 ; PMOD2.1@82.463,42.024 cw(c83.14,41.512) 83.14,42.361 ; PMOD2.1@82.463,42.698 ccw(c83.14,43.21) 83.14,42.361 ; PMOD3.1@82.468,25.348 cw(c83.121,24.868) 83.121,25.679 ; PMOD3.1@82.468,26.011 ccw(c83.121,26.491) 83.121,25.679 ; PMOD1.1@82.483,58.733 cw(c83.058,58.353) 83.058,59.042 ; PMOD1.1@82.483,59.351 ccw(c83.058,59.732) 83.058,59.042 ; C63.1@84.401,25.006 cw(c84.401,24.172) C63.1@85.152,24.533 ; C63.1@84.465,24.77 ccw(c83.894,24.199) 83.894,25.006 ccw(c83.894,25.814) C63.1@84.465,25.243 ; C72.1@84.465,41.546 ccw(c83.894,40.975) 83.894,41.783 ccw(c83.894,42.59) C72.1@84.465,42.019 ; C73.1@84.465,58.323 ccw(c83.894,57.752) 83.894,58.559 ccw(c83.894,59.367) C73.1@84.465,58.796 ; v5@84.809,24.368 ccw(c83.795,23.881) 83.795,25.006 ; C63.1@85.052,25.006 83.795,25.006 ; C72.1@85.052,41.783 83.719,41.783 83.141,42.361 ; C73.1@85.052,58.559 83.541,58.559 83.058,59.042 ; 83.121,25.679 83.795,25.006
  other v1: 74.016,67.17 69.863,67.627 71.704,67.627 61.493,67.818
  other v5: 85.026,24.473 6.731,39.713 85.026,41.097 85.026,57.887
3V3_IN: C60.1 D5.1 F3.2 R32.1 R33.1 U3.17 U3.18 U3.19 | length 26.8
  Top Layer w0.254: D5.1@41.047,34.874 43.307,34.874 43.51,34.671 43.51,32.425 ; D5.1@41.328,34.593 cw(c42.007,33.913) 42.007,34.874 cw(c42.007,35.835) D5.1@41.328,35.156 ; U3.17@42.271,31.125 43.406,31.125 43.51,31.229 43.51,31.801 ; U3.18@42.271,31.775 43.484,31.775 43.51,31.801 ; U3.19@42.271,32.425 43.523,32.425 43.51,32.412 43.51,31.801 ; C60.1@46.344,32.414 C60.1@46.557,32.626
  Top Layer w0.381: F3.2@44.175,32.812 cw(c43.523,33.167) 43.523,32.425 C60.1@46.355,32.425 ; F3.2@45.001,32.362 cw(c44.188,30.948) R32.1@45.819,30.948 ; F3.2@45.191,32.692 cw(c44.567,31.606) 45.819,31.606 ; F3.2@45.381,33.022 cw(c44.946,32.265) 45.819,32.265 ; F3.2@45.427,32.864 ccw(c46.355,33.626) C60.1@46.355,32.425 ; R32.1@45.671,30.879 cw(c45.313,30.521) 45.819,30.521 cw(c46.325,30.521) R32.1@45.967,30.879 ; R32.1@45.671,31.275 ccw(c45.313,31.633) 45.819,31.633 ccw(c46.325,31.633) R32.1@45.967,31.275 ; R33.1@45.675,29.802 ccw(c45.327,30.15) 45.819,30.15 ; F3.2@45.685,32.425 ccw(c45.685,33.448) C60.1@46.409,32.724 ; 45.819,30.169 ccw(c46.338,30.169) R33.1@45.971,29.802 ; 45.819,32.326 R32.1@45.819,31.077 45.819,29.608 R33.1@45.823,29.604 ; 46.087,32.497 ccw(c46.145,32.714) C60.1@46.358,32.643 ; C60.1@46.557,32.626 C60.1@46.355,32.425
5V0: C57.1 C58.2 D3.2 D4.2 D5.2 F1.1 L3.1 R29.1 R31.2 U3.2 U3.3 U3.7 U3.9 U3.10 U4.1 U4.3 | length 79.7
  Top Layer w0.203: U4.1@25.55,27.637 U4.1@25.686,27.772
  Top Layer w0.254: F1.1@17.704,25.133 20.256,25.133 ; F1.1@18.156,25.337 ccw(c18.646,25.827) 18.646,25.133 ; F1.1@18.335,24.953 cw(c18.77,24.519) 18.77,25.133 ; F1.1@18.335,25.516 ccw(c19.259,26.44) 19.259,25.133 ; L3.1@20.051,26.094 cw(c19.585,25.628) 20.244,25.628 cw(c20.903,25.628) L3.1@20.437,26.094 ; L3.1@20.244,26.288 20.244,25.146 20.256,25.133 ; C58.2@23.279,26.288 24.459,26.288 24.473,26.302 ; C58.2@23.522,26.094 cw(c23.988,25.628) 23.988,26.288 cw(c23.988,26.947) C58.2@23.522,26.481 ; D3.2@24.636,29.468 cw(c23.956,28.788) 24.917,28.788 cw(c25.878,28.788) D3.2@25.199,29.468 ; D3.2@24.917,30.099 24.917,27.785 24.93,27.772 ; U4.3@25.314,25.75 ccw(c25.018,25.455) 25.018,25.872 ccw(c25.018,26.29) U4.3@25.314,25.995 ; U4.1@25.314,27.65 ccw(c25.018,27.355) 25.018,27.772 ccw(c25.018,28.19) U4.1@25.314,27.895 ; U4.3@25.686,25.872 24.473,25.872 ; U4.1@25.686,27.772 24.93,27.772 ; C57.1@30.974,32.333 ccw(c30.508,31.867) 30.508,32.526 ccw(c30.508,33.185) C57.1@30.974,32.719 ; C57.1@31.46,32.333 cw(c31.926,31.867) 31.926,32.526 cw(c31.926,33.185) C57.1@31.46,32.719 ; R29.1@32.392,32.333 ccw(c31.926,31.867) 31.926,32.526 ccw(c31.926,33.185) R29.1@32.392,32.719 ; R29.1@32.878,32.333 cw(c33.344,31.867) 33.344,32.526 cw(c33.344,33.185) R29.1@32.878,32.719 ; 33.642,25.159 33.642,27.225 ; R31.2@34.288,32.333 ccw(c33.822,31.867) 33.822,32.526 ccw(c33.822,33.185) R31.2@34.288,32.719 ; R31.2@34.774,32.333 cw(c34.996,32.112) 34.996,32.425 ; R31.2@34.815,32.667 ccw(c35.242,32.923) 35.242,32.425 ; U3.10@36.571,27.225 33.642,27.225 ; U3.9@36.571,27.875 33.642,27.875 ; U3.7@36.571,29.175 33.912,29.175 33.642,28.905 33.642,27.875 ; U3.3@36.571,31.775 35.408,31.775 35.242,31.941 35.242,32.425 ; U3.2@36.571,32.425 35.242,32.425 ; D4.2@37.615,24.852 ccw(c36.936,24.172) 36.936,25.133 ccw(c36.936,26.094) D4.2@37.615,25.415 ; D5.2@37.615,34.593 ccw(c36.936,33.913) 36.936,34.874 ccw(c36.936,35.835) D5.2@37.615,35.156 ; D4.2@37.897,25.133 31.305,25.133 ; D5.2@37.897,34.874 35.42,34.874 35.242,34.696 35.242,32.425 ; 20.256,25.133 24.473,25.133 ; 24.473,25.133 24.473,25.872 ; 24.473,25.133 31.305,25.133 ; 24.473,25.872 24.473,26.302 ; 24.473,26.302 24.473,27.61 24.636,27.772 24.93,27.772 ; 31.305,25.133 31.305,28.232 30.099,29.439 30.099,32.156 30.469,32.526 C57.1@31.217,32.526 R29.1@32.635,32.526 34.392,32.526 34.493,32.425 35.242,32.425 ; 33.642,27.225 33.642,27.875
50MHZ: U5.M12 XTAL1.3 | length 4
  Top Layer w0.152: XTAL1.3@24.486,39.382 24.486,39.395 U5.M12@26.199,41.109 ; XTAL1.3@24.678,39.81 ccw(c24.678,40.348) 25.058,39.968 ; XTAL1.3@24.927,39.561 cw(c25.59,39.561) 25.121,40.03 ; U5.M12@26.025,41.109 cw(c25.606,41.109) 25.903,40.812 cw(c26.199,40.515) U5.M12@26.199,40.935
AGND: R39.2 U5.G6 U5.H6 | length 2
  Top Layer w0.381: U5.H6@24.785,48.18 v1(25.492,48.18) U5.G6@25.492,48.887
  Bottom Layer w0.381: v1(25.492,48.18) 25.498,48.18 R39.2@25.908,48.59
ANALOG1: Shiel1.7 U5.J1 | length 27.9
  Top Layer w0.089: U5.J1@20.397,51.153 ccw(c20.046,51.504) 20.542,51.504 ccw(c21.039,51.504) U5.J1@20.688,51.153 ; v1@20.415,51.564 cw(c20.107,51.256) 20.542,51.256 cw(c20.978,51.256) v1@20.67,51.564 ; v1@20.428,51.552 cw(c20.297,51.391) 20.498,51.337 ; v1@20.452,51.535 cw(c20.317,51.301) 20.578,51.371 ; U5.J1@20.46,51.091 ccw(c20.261,51.29) 20.542,51.29 ccw(c20.824,51.29) U5.J1@20.625,51.091 ; 20.507,51.371 cw(c20.768,51.301) v1@20.633,51.535 ; U5.J1@20.542,51.008 v1(20.542,51.692) ; 20.587,51.337 cw(c20.787,51.391) v1@20.656,51.552
  Bottom Layer w0.089: v1@20.415,51.819 ccw(c20.107,52.128) 20.542,52.128 ccw(c20.978,52.128) v1@20.67,51.819 ; v1(20.542,51.692) 20.542,64.7 25.629,69.787 27.292,69.787 27.534,70.028 ; Shiel1.7@27.455,70.121 cw(c27.439,70.028) 27.534,70.028 ; Shiel1.7@27.534,71.285 27.534,70.028 ; Shiel1.7@27.612,70.121 ccw(c27.629,70.028) 27.534,70.028
ANALOG2: Shiel1.9 U5.J2 | length 36
  Top Layer w0.089: U5.J2@21.104,50.446 ccw(c20.753,50.797) 21.25,50.797 ccw(c21.746,50.797) U5.J2@21.395,50.446 ; v1@21.122,50.88 cw(c20.814,50.572) 21.25,50.572 cw(c21.685,50.572) v1@21.377,50.88 ; v1@21.135,50.869 cw(c20.993,50.698) 21.207,50.64 ; v1@21.159,50.852 cw(c21.034,50.636) 21.276,50.7 ; U5.J2@21.167,50.384 ccw(c20.968,50.583) 21.25,50.583 ccw(c21.531,50.583) U5.J2@21.332,50.384 ; v1@21.191,50.937 cw(c21.09,50.815) 21.243,50.774 ; 21.224,50.7 cw(c21.465,50.636) v1@21.34,50.852 ; U5.J2@21.25,50.301 v1(21.25,51.008) ; 21.256,50.774 cw(c21.409,50.815) v1@21.308,50.937 ; 21.292,50.64 cw(c21.506,50.698) v1@21.365,50.869
  Bottom Layer w0.089: v1@21.122,51.136 ccw(c20.814,51.444) 21.25,51.444 ccw(c21.685,51.444) v1@21.377,51.136 ; v1(21.25,51.008) 21.25,65.156 25.702,69.609 29.68,69.609 ; Shiel1.9@29.718,70.286 cw(c29.32,69.968) 29.68,69.609 ; 29.75,69.679 ccw(c29.398,70.031) Shiel1.9@29.787,70.341 ; 29.82,69.749 ccw(c29.477,70.093) Shiel1.9@29.857,70.397 ; 29.891,69.82 ccw(c29.555,70.156) Shiel1.9@29.926,70.452 ; 29.961,69.89 ccw(c29.633,70.218) Shiel1.9@29.996,70.508 ; Shiel1.9@30.019,70.118 cw(c30.008,70.027) 30.099,70.027 ; 30.031,69.96 ccw(c29.711,70.28) Shiel1.9@30.065,70.563 ; Shiel1.9@30.099,71.285 30.099,70.028 ; 30.102,70.03 ccw(c29.789,70.343) Shiel1.9@30.134,70.619 ; Shiel1.9@30.178,70.127 ccw(c30.201,70.027) 30.099,70.027 ; 29.68,69.609 30.099,70.028
ANALOG3: Shiel1.12 U5.K1 | length 47.8
  Top Layer w0.089: v1@19.348,50.589 cw(c19.307,50.225) U5.K1@19.625,50.408 ; v1@19.357,50.678 cw(c19.331,50.441) 19.537,50.56 ; v1@19.367,50.588 cw(c19.367,50.152) 19.676,50.461 cw(c19.984,50.769) v1@19.548,50.769 ; v1(19.367,50.769) U5.K1@19.835,50.301 ; v1@19.414,50.594 cw(c19.489,50.315) 19.634,50.565 ; v1@19.459,50.779 ccw(c19.695,50.805) 19.576,50.599 ; v1@19.542,50.722 ccw(c19.822,50.647) 19.571,50.502 ; v1@19.547,50.789 ccw(c19.912,50.829) U5.K1@19.728,50.511 ; U5.K1@19.63,50.301 ccw(c19.134,50.301) 19.484,50.652 ccw(c19.835,51.003) U5.K1@19.835,50.507 ; U5.K1@19.719,50.301 ccw(c19.437,50.301) 19.636,50.5 ccw(c19.835,50.699) U5.K1@19.835,50.418
  Bottom Layer w0.089: v1@19.187,50.769 ccw(c18.751,50.769) 19.059,51.077 ccw(c19.367,51.385) v1@19.367,50.949 ; v1(19.367,50.769) 19.037,51.099 19.037,73.571 19.418,73.952 32.042,73.952 32.614,74.524 Shiel1.12@32.614,76.365 ; Shiel1.12@32.291,75.328 cw(c31.514,74.55) 32.614,74.55 cw(c33.713,74.55) Shiel1.12@32.936,75.328 ; Shiel1.12@32.354,75.391 cw(c31.728,74.765) 32.614,74.765 cw(c33.499,74.765) Shiel1.12@32.873,75.391 ; Shiel1.12@32.417,75.454 cw(c31.943,74.98) 32.614,74.98 cw(c33.284,74.98) Shiel1.12@32.81,75.454
ANALOG4: Shiel1.5 U5.K2 | length 31.3
  Top Layer w0.089: U5.K2@20.397,49.739 ccw(c20.046,50.09) 20.542,50.09 ccw(c21.039,50.09) U5.K2@20.688,49.739 ; v1@20.415,50.173 cw(c20.107,49.865) 20.542,49.865 cw(c20.978,49.865) v1@20.67,50.173 ; v1@20.427,50.162 cw(c20.286,49.991) 20.5,49.933 ; v1@20.452,50.145 cw(c20.327,49.929) 20.568,49.993 ; U5.K2@20.46,49.676 ccw(c20.261,49.876) 20.542,49.876 ccw(c20.824,49.876) U5.K2@20.625,49.676 ; v1@20.484,50.23 cw(c20.383,50.108) 20.536,50.067 ; 20.516,49.993 cw(c20.757,49.929) v1@20.633,50.145 ; U5.K2@20.542,49.594 v1(20.542,50.301) ; 20.549,50.067 cw(c20.702,50.108) v1@20.601,50.23 ; 20.584,49.933 cw(c20.799,49.991) v1@20.657,50.162
  Bottom Layer w0.089: v1@20.362,50.301 ccw(c19.926,50.301) 20.234,50.609 ccw(c20.542,50.917) v1@20.542,50.482 ; v1(20.542,50.301) 20.146,50.697 20.146,54.301 20.142,54.305 20.142,64.719 24.994,69.571 ; Shiel1.5@24.695,70.226 cw(c24.125,69.571) 24.994,69.571 ; Shiel1.5@24.753,70.293 cw(c24.295,69.766) 24.994,69.766 cw(c25.693,69.766) Shiel1.5@25.234,70.293 ; Shiel1.5@24.811,70.36 cw(c24.464,69.961) 24.994,69.961 cw(c25.523,69.961) Shiel1.5@25.176,70.36 ; Shiel1.5@24.994,71.285 24.994,69.571 ; Shiel1.5@25.292,70.226 ccw(c25.862,69.571) 24.994,69.571
ANALOG5: Shiel1.8 U5.L1 | length 40.8
  Top Layer w0.089: v1(18.421,49.594) U5.L1@19.128,49.594 ; v1@18.492,49.536 cw(c18.614,49.434) 18.655,49.588 ; v1@18.492,49.652 ccw(c18.614,49.753) 18.655,49.6 ; v1@18.549,49.466 cw(c18.857,49.158) 18.857,49.594 cw(c18.857,50.03) v1@18.549,49.722 ; v1@18.56,49.479 cw(c18.731,49.338) 18.789,49.552 ; v1@18.56,49.709 ccw(c18.731,49.85) 18.789,49.636 ; v1@18.577,49.504 cw(c18.794,49.379) 18.729,49.62 ; v1@18.577,49.684 ccw(c18.794,49.809) 18.729,49.568 ; U5.L1@18.983,49.449 ccw(c18.632,49.098) 18.632,49.594 ccw(c18.632,50.09) U5.L1@18.983,49.739 ; U5.L1@19.046,49.511 ccw(c18.847,49.312) 18.847,49.594 ccw(c18.847,49.876) U5.L1@19.046,49.676
  Bottom Layer w0.089: v1@18.293,49.722 ccw(c17.985,50.03) 18.421,50.03 ccw(c18.857,50.03) v1@18.549,49.722 ; v1(18.421,49.594) 18.421,73.755 19.101,74.435 26.975,74.435 27.534,74.993 ; Shiel1.8@27.374,75.223 cw(c27.288,74.994) 27.534,74.994 ; Shiel1.8@27.405,75.307 cw(c27.336,75.122) 27.534,75.122 cw(c27.731,75.122) Shiel1.8@27.662,75.307 ; Shiel1.8@27.534,76.365 27.534,74.993 ; Shiel1.8@27.693,75.223 ccw(c27.779,74.994) 27.534,74.994
ANALOG6: Shiel1.10 U5.L2 | length 47.2
  Top Layer w0.089: v1(19.128,48.887) U5.L2@19.835,48.887 ; v1@19.199,48.828 cw(c19.321,48.727) 19.362,48.881 ; v1@19.199,48.945 ccw(c19.321,49.046) 19.362,48.893 ; v1@19.256,48.759 cw(c19.564,48.451) 19.564,48.887 cw(c19.564,49.323) v1@19.256,49.014 ; v1@19.267,48.772 cw(c19.438,48.63) 19.496,48.845 ; v1@19.267,49.002 ccw(c19.438,49.143) 19.496,48.929 ; v1@19.285,48.797 cw(c19.501,48.672) 19.436,48.913 ; v1@19.285,48.977 ccw(c19.501,49.102) 19.436,48.861 ; U5.L2@19.69,48.741 ccw(c19.339,48.391) 19.339,48.887 ccw(c19.339,49.383) U5.L2@19.69,49.032 ; U5.L2@19.753,48.804 ccw(c19.554,48.605) 19.554,48.887 ccw(c19.554,49.168) U5.L2@19.753,48.969
  Bottom Layer w0.089: v1@19.001,49.014 ccw(c18.692,49.323) 19.128,49.323 ccw(c19.564,49.323) v1@19.256,49.014 ; v1(19.128,48.887) 19.128,49.719 18.783,50.063 18.783,73.762 19.19,74.168 29.781,74.168 30.074,74.46 Shiel1.10@30.074,76.365 ; Shiel1.10@29.751,75.328 cw(c28.974,74.55) 30.074,74.55 cw(c31.173,74.55) Shiel1.10@30.396,75.328 ; Shiel1.10@29.814,75.391 cw(c29.188,74.765) 30.074,74.765 cw(c30.959,74.765) Shiel1.10@30.333,75.391 ; Shiel1.10@29.877,75.454 cw(c29.403,74.98) 30.074,74.98 cw(c30.744,74.98) Shiel1.10@30.27,75.454
ANALOG7: Shiel1.4 U5.M1 | length 35.8
  Top Layer w0.089: v1(17.678,48.882) 17.683,48.887 U5.M1@18.421,48.887 ; v1@17.743,48.817 cw(c17.911,48.65) 17.911,48.887 ; v1@17.806,48.755 cw(c18.125,48.436) 18.125,48.887 ; v1@17.806,49.01 ccw(c18.103,49.307) 18.103,48.887 ; U5.M1@18.276,48.741 ccw(c17.925,48.391) 17.925,48.887 ccw(c17.925,49.383) U5.M1@18.276,49.032 ; U5.M1@18.339,48.804 ccw(c18.139,48.605) 18.139,48.887 ccw(c18.139,49.168) U5.M1@18.339,48.969
  Bottom Layer w0.089: v1@17.551,49.01 ccw(c17.243,49.318) 17.678,49.318 ccw(c18.114,49.318) v1@17.806,49.01 ; v1(17.678,48.882) 17.678,74.155 18.402,74.879 22.301,74.879 22.454,75.032 ; Shiel1.4@22.318,75.215 cw(c22.262,75.032) 22.454,75.032 ; Shiel1.4@22.454,76.365 22.454,75.032 ; Shiel1.4@22.589,75.215 ccw(c22.646,75.032) 22.454,75.032
ANALOG8: Shiel1.6 U5.M2 | length 40.9
  Top Layer w0.089: v1(18.421,48.18) U5.M2@19.128,48.18 ; v1@18.492,48.121 cw(c18.614,48.02) 18.655,48.174 ; v1@18.492,48.238 ccw(c18.614,48.339) 18.655,48.186 ; v1@18.549,48.052 cw(c18.857,47.744) 18.857,48.18 cw(c18.857,48.616) v1@18.549,48.307 ; v1@18.56,48.065 cw(c18.731,47.923) 18.789,48.138 ; v1@18.56,48.295 ccw(c18.731,48.436) 18.789,48.222 ; v1@18.577,48.089 cw(c18.794,47.965) 18.729,48.206 ; v1@18.577,48.27 ccw(c18.794,48.395) 18.729,48.154 ; U5.M2@18.983,48.034 ccw(c18.632,47.683) 18.632,48.18 ccw(c18.632,48.676) U5.M2@18.983,48.325 ; U5.M2@19.046,48.097 ccw(c18.847,47.898) 18.847,48.18 ccw(c18.847,48.461) U5.M2@19.046,48.262
  Bottom Layer w0.089: v1@18.293,48.307 ccw(c17.985,48.616) 18.421,48.616 ccw(c18.857,48.616) v1@18.549,48.307 ; v1(18.421,48.18) 18.421,49.033 18.025,49.43 18.025,74.019 18.682,74.676 24.778,74.676 24.994,74.892 ; Shiel1.6@24.78,75.248 cw(c24.59,74.892) 24.994,74.892 ; Shiel1.6@24.821,75.326 cw(c24.669,75.04) 24.994,75.04 cw(c25.318,75.04) Shiel1.6@25.166,75.326 ; Shiel1.6@24.994,76.365 24.994,74.892 ; Shiel1.6@25.207,75.248 ccw(c25.397,74.892) 24.994,74.892
ANALOG9: Shiel1.3 U5.K3 | length 32.4
  Top Layer w0.089: v1(20.542,48.887) U5.K3@21.25,48.887 ; v1@20.613,48.828 cw(c20.735,48.727) 20.776,48.881 ; v1@20.613,48.945 ccw(c20.735,49.046) 20.776,48.893 ; v1@20.67,48.759 cw(c20.978,48.451) 20.978,48.887 cw(c20.978,49.323) v1@20.67,49.014 ; v1@20.682,48.772 cw(c20.853,48.63) 20.91,48.845 ; v1@20.682,49.002 ccw(c20.853,49.143) 20.91,48.929 ; v1@20.699,48.797 cw(c20.915,48.672) 20.85,48.913 ; v1@20.699,48.977 ccw(c20.915,49.102) 20.85,48.861 ; U5.K3@21.104,48.741 ccw(c20.753,48.391) 20.753,48.887 ccw(c20.753,49.383) U5.K3@21.104,49.032 ; U5.K3@21.167,48.804 ccw(c20.968,48.605) 20.968,48.887 ccw(c20.968,49.168) U5.K3@21.167,48.969
  Bottom Layer w0.089: 19.964,54.232 19.964,66.878 22.454,69.367 Shiel1.3@22.454,71.285 ; 19.968,54.228 19.968,49.461 v1(20.542,48.887) ; v1@20.362,48.887 ccw(c19.926,48.887) 20.234,49.195 ccw(c20.542,49.503) v1@20.542,49.067 ; Shiel1.3@22.131,70.248 cw(c21.354,69.47) 22.454,69.47 cw(c23.553,69.47) Shiel1.3@22.776,70.248 ; Shiel1.3@22.194,70.311 cw(c21.568,69.685) 22.454,69.685 cw(c23.339,69.685) Shiel1.3@22.713,70.311 ; Shiel1.3@22.257,70.374 cw(c21.783,69.9) 22.454,69.9 cw(c23.124,69.9) Shiel1.3@22.65,70.374
ANALOG10: Shiel1.11 U5.J3 | length 37.3
  Top Layer w0.089: U5.J3@21.811,49.739 ccw(c21.46,50.09) 21.957,50.09 ccw(c22.453,50.09) U5.J3@22.102,49.739 ; v1@21.829,50.173 cw(c21.521,49.865) 21.957,49.865 cw(c22.393,49.865) v1@22.084,50.173 ; v1@21.842,50.162 cw(c21.7,49.991) 21.915,49.933 ; v1@21.866,50.145 cw(c21.742,49.929) 21.983,49.993 ; U5.J3@21.874,49.676 ccw(c21.675,49.876) 21.957,49.876 ccw(c22.238,49.876) U5.J3@22.039,49.676 ; v1@21.898,50.23 cw(c21.797,50.108) 21.95,50.067 ; 21.931,49.993 cw(c22.172,49.929) v1@22.047,50.145 ; U5.J3@21.957,49.594 v1(21.957,50.301) ; 21.963,50.067 cw(c22.116,50.108) v1@22.015,50.23 ; 21.999,49.933 cw(c22.213,49.991) v1@22.072,50.162
  Bottom Layer w0.089: v1@21.829,50.429 ccw(c21.521,50.737) 21.957,50.737 ccw(c22.393,50.737) v1@22.084,50.429 ; v1(21.957,50.301) 21.957,51.868 21.577,52.248 21.577,65.232 25.776,69.431 32.398,69.431 32.614,69.647 ; Shiel1.11@32.336,70.209 cw(c31.906,69.647) 32.614,69.647 ; Shiel1.11@32.391,70.279 cw(c32.044,69.827) 32.614,69.827 cw(c33.183,69.827) Shiel1.11@32.837,70.279 ; Shiel1.11@32.445,70.35 cw(c32.182,70.007) 32.614,70.007 cw(c33.045,70.007) Shiel1.11@32.783,70.35 ; Shiel1.11@32.614,71.285 32.614,69.647 ; Shiel1.11@32.891,70.209 ccw(c33.321,69.647) 32.614,69.647
ANALOG11: Shiel1.2 U5.M3 | length 41.3
  Top Layer w0.089: v1(19.128,47.473) U5.M3@19.835,47.473 ; v1@19.199,47.414 cw(c19.321,47.313) 19.362,47.466 ; v1@19.199,47.531 ccw(c19.321,47.632) 19.362,47.479 ; v1@19.256,47.345 cw(c19.564,47.037) 19.564,47.473 cw(c19.564,47.908) v1@19.256,47.6 ; v1@19.267,47.358 cw(c19.438,47.216) 19.496,47.431 ; v1@19.267,47.588 ccw(c19.438,47.729) 19.496,47.515 ; v1@19.285,47.382 cw(c19.501,47.258) 19.436,47.499 ; v1@19.285,47.563 ccw(c19.501,47.688) 19.436,47.447 ; U5.M3@19.69,47.327 ccw(c19.339,46.976) 19.339,47.473 ccw(c19.339,47.969) U5.M3@19.69,47.618 ; U5.M3@19.753,47.39 ccw(c19.554,47.191) 19.554,47.473 ccw(c19.554,47.754) U5.M3@19.753,47.555
  Bottom Layer w0.089: v1@19.001,47.345 ccw(c18.692,47.037) 18.692,47.473 ccw(c18.692,47.908) v1@19.001,47.6 ; v1(19.128,47.473) 18.085,47.473 17.282,48.275 17.282,75.778 17.869,76.365 Shiel1.2@19.914,76.365 ; Shiel1.2@19.591,76.043 ccw(c18.814,75.265) 18.814,76.365 ccw(c18.814,77.465) Shiel1.2@19.591,76.687 ; Shiel1.2@19.654,76.106 ccw(c19.028,75.48) 19.028,76.365 ccw(c19.028,77.25) Shiel1.2@19.654,76.624 ; Shiel1.2@19.717,76.169 ccw(c19.243,75.695) 19.243,76.365 ccw(c19.243,77.036) Shiel1.2@19.717,76.561
ANALOG12: Shiel1.1 U5.L3 | length 33.2
  Top Layer w0.089: v1(19.835,48.18) U5.L3@20.542,48.18 ; v1@19.906,48.121 cw(c20.028,48.02) 20.069,48.174 ; v1@19.906,48.238 ccw(c20.028,48.339) 20.069,48.186 ; v1@19.963,48.052 cw(c20.271,47.744) 20.271,48.18 cw(c20.271,48.616) v1@19.963,48.307 ; v1@19.974,48.065 cw(c20.146,47.923) 20.203,48.138 ; v1@19.974,48.295 ccw(c20.146,48.436) 20.203,48.222 ; v1@19.992,48.089 cw(c20.208,47.965) 20.143,48.206 ; v1@19.992,48.27 ccw(c20.208,48.395) 20.143,48.154 ; U5.L3@20.397,48.034 ccw(c20.046,47.683) 20.046,48.18 ccw(c20.046,48.676) U5.L3@20.397,48.325 ; U5.L3@20.46,48.097 ccw(c20.261,47.898) 20.261,48.18 ccw(c20.261,48.461) U5.L3@20.46,48.262
  Bottom Layer w0.089: Shiel1.1@19.591,70.248 cw(c19.12,69.777) 19.787,69.777 ; Shiel1.1@19.654,70.311 cw(c19.335,69.992) 19.787,69.992 ; v1@19.708,48.307 ccw(c19.508,48.507) 19.79,48.507 ; 19.787,54.158 Shiel1.1@19.787,71.285 ; 19.787,69.164 cw(c21.32,69.164) Shiel1.1@20.236,70.248 ; 19.787,69.378 cw(c21.105,69.378) Shiel1.1@20.173,70.311 ; 19.787,69.593 cw(c20.891,69.593) Shiel1.1@20.11,70.374 ; 19.787,69.808 cw(c20.676,69.808) Shiel1.1@20.047,70.437 ; 19.787,70.022 cw(c20.462,70.022) Shiel1.1@19.984,70.499 ; 19.79,48.509 ccw(c20.165,48.509) v1@19.9,48.245 ; 19.79,48.724 ccw(c20.38,48.724) v1@19.963,48.307 ; 19.79,54.154 19.79,48.225 v1(19.835,48.18)